# Altium PCB NGNIv1_32.PcbDoc
Units mm, origin at the board's own origin, x right, y up, seen from the top; angles counter-clockwise.
Board outline 13.53 x 22.03 mm, 4 copper layers (Component Side, Signal Layer 1, Signal Layer 2, Solder Side), stack 1.018 mm thick; 42 components, 78 nets, 338 pads, 161 vias.
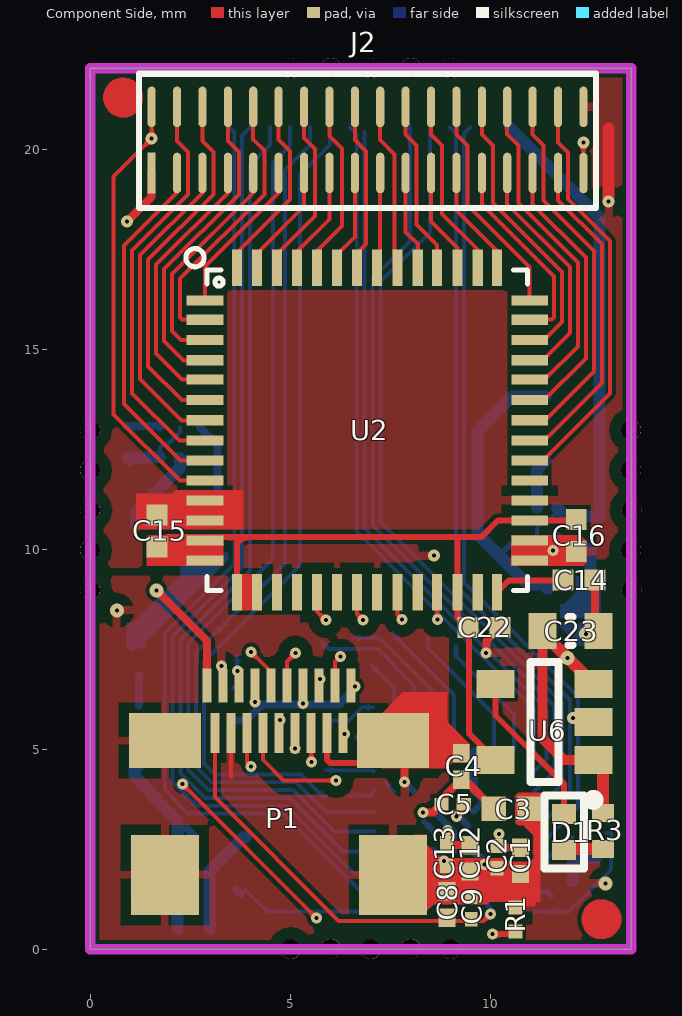
[diagram p0: Component Side view]
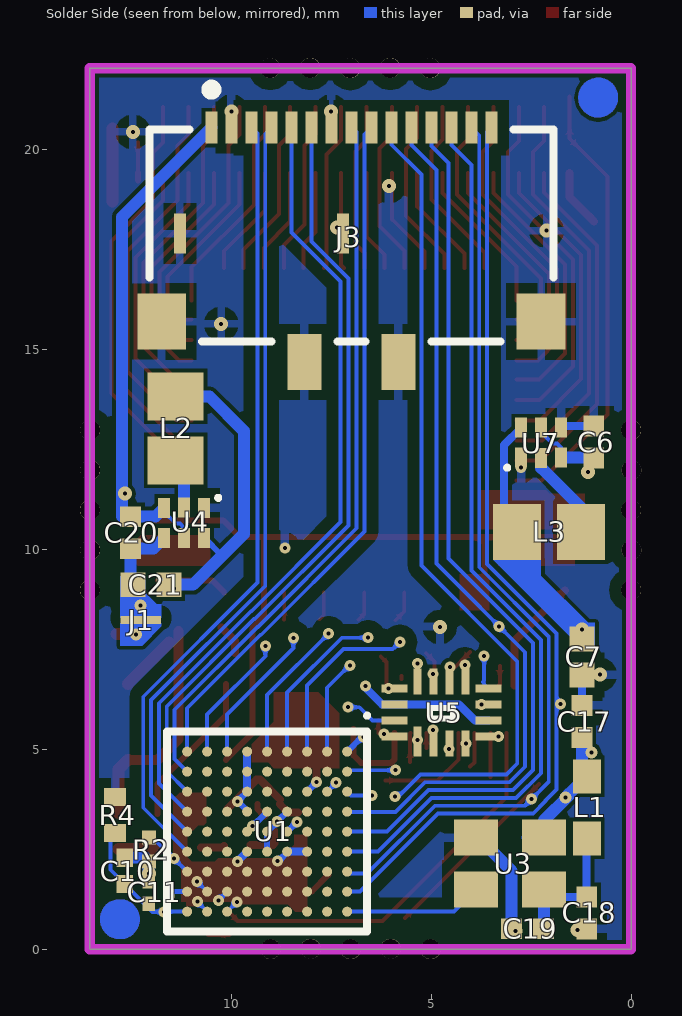
[diagram p1: Solder Side view, seen from below]
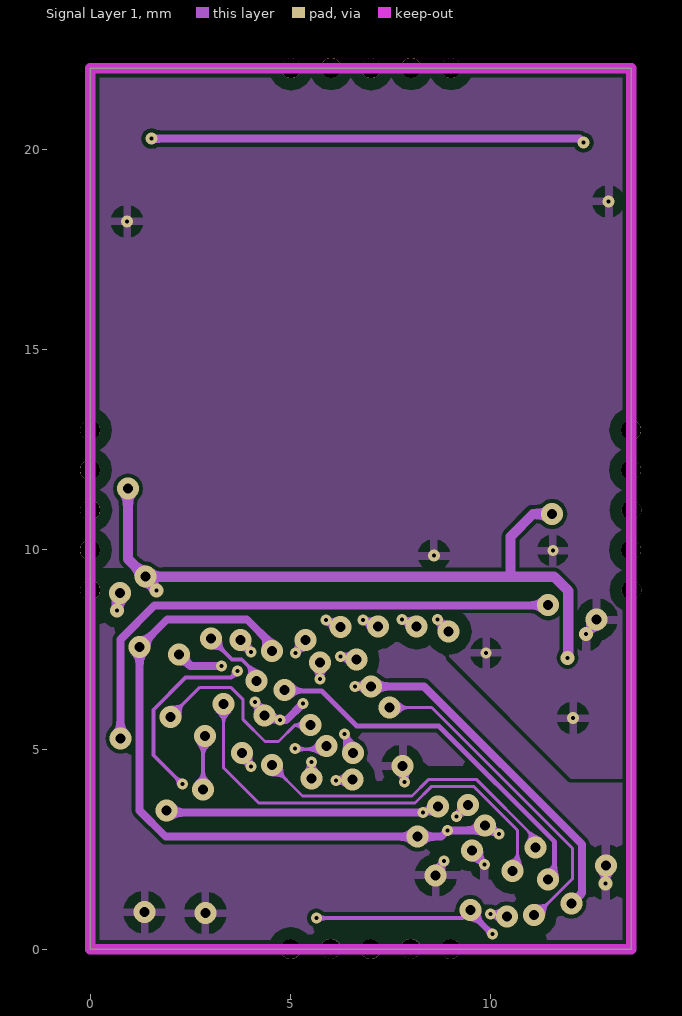
[diagram p2: Signal Layer 1]
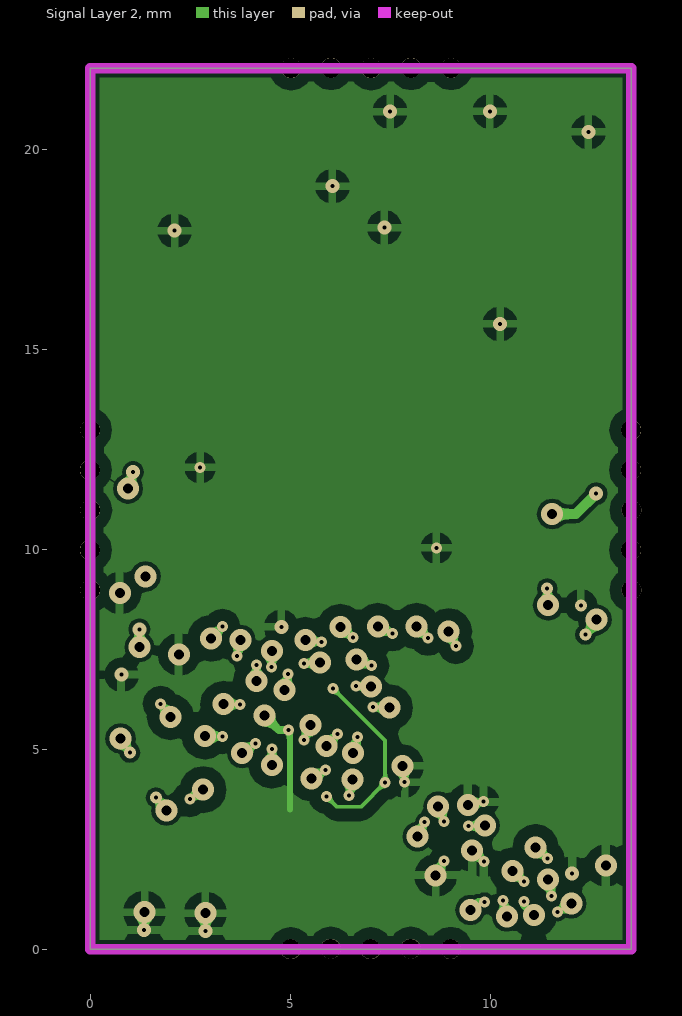
[diagram p3: Signal Layer 2]

## Layer stack, top to bottom
Top Solder: solder mask 0.015, Solder Resist, Dk 3.5
Component Side: signal copper 0.055
Dielectric 7: prepreg 0.068, 1080, Dk 3.5
Signal Layer 1: signal copper 0.035
Dielectric 3: core 0.71, 018+018+TG135, Dk 4.6
Signal Layer 2: signal copper 0.035
Dielectric 4: prepreg 0.06, 1080, Dk 3.5
Solder Side: signal copper 0.055
Bottom Solder: solder mask 0.015, Solder Resist, Dk 3.5

## Board outline
0,0 0,22.025 13.53,22.025 13.53,0

## Design rules (kind name [scope] priority, off if disabled: settings)
BoardOutlineClearance [All] p1: gap=0.23
Clearance Clearance_ploygon [InPolygon vs InNetClass('50Ohm')] p1: gap=0.3
Clearance Clearance_ploygon_mousebite [InPolygon vs (IsPad AND OnLayer('Multi-Layer'))] p2: gap=0.3
Clearance Clearance_fidu [InPolygon vs IsArc] p3: gap=0.1
Clearance Clearance_BGA [(InComponent('U1') AND IsPad)] p4: gap=0.09
Clearance Clearance-xPP-xTP-xTT [All] p5: gap=0.1
ComponentClearance [All] p1: gap=0.25 collisioncheckmode=3 verticalgap=0.25 showdistances=FALSE
DiffPairsRouting DiffPair_LVDS_100DiffPairsRouting [InDifferentialPairClass('LVDS_100')] p1: maxlimit=0.178 minlimit=0.15 mostfreqgap=0.152 toplayer_prefgap=0.152 toplayer_minwidth=0.15 toplayer_maxwidth=0.6 toplayer_prefwidth=0.25 midlayer1_maxgap=0.178 midlayer1_minwidth=0.15 midlayer1_maxwidth=0.6 midlayer1_prefwidth=0.25 midlayer2_maxgap=0.178 midlayer2_minwidth=0.15 midlayer2_maxwidth=0.6 midlayer2_prefwidth=0.25 bottomlayer_prefgap=0.152 bottomlayer_minwidth=0.15 bottomlayer_maxwidth=0.6 bottomlayer_prefwidth=0.25 maxuncoupledlength=12.7
FanoutControl Fanout_BGA [IsBGA] p1: bgadir=Out bgaviamode=Centered fanoutstyle=BGA fanoutdirection=Alternating viagrid=0.025 // Fanout_BGA (Default Rule)
Height [All] p1: minheight=0 maxheight=25 prefheight=12.5
HoleSize HoleSize-PTH [All] p1: absolutevalues=TRUE maxlimit=6.3 minlimit=0.1 maxpercent=80.000 minpercent=20.000
HoleToHoleClearance [All] p1: gap=0.15 allowstackedmicrovias=TRUE
MatchedLengths DiffPair_LVDS_100MatchedLengths [InDifferentialPairClass('LVDS_100')] p1: tolerance=12 checknetsindiffpair=TRUE checkdiffpairvsdiffpair=FALSE checkothers=FALSE
MaxMinImpedance DiffPair_LVDS_100 [InDifferentialPairClass('LVDS_100')] p1: minimum=100.0 maximum=100.0
MinimumAnnularRing "Minimum IAR  >0.45mm" [((ObjectKind = 'Pad') OR (ObjectKind = 'Via')) And (Layer = 'MultiLayer') And (HoleDiameter > AsMM(0.45))] p1 off: minimumring=0.25 // minimum inner annular ring for pads > 0.45mm finished hole size
MinimumAnnularRing "Minimum IAR <=0.45mm" [((ObjectKind = 'Pad') OR (ObjectKind = 'Via')) And (Layer = 'MultiLayer') And (HoleDiameter <= AsMM(0.45))] p2: minimumring=0.088 // minimum inner annular ring for pads <= 0.45mm finished hole size
MinimumSolderMaskSliver [All] p1: minsoldermaskwidth=0.04
PlaneClearance PlaneClearance-IPI [All] p1: clearance=0.4
PlaneConnect [All] p1: planeconnectstyle=Relief reliefexpansion=0.4 reliefentries=4 reliefconductorwidth=0.2 reliefairgap=0.2
PolygonConnect [All vs IsNamedPolygon('VCC_1.5_L04_P002')] p1: connectstyle=Relief reliefconductorwidth=0.254 reliefentries=4 polygonreliefangle="90 Angle" airgapwidth=0.254
PolygonConnect PolygonConnect-xTW [All] p2: connectstyle=Relief reliefconductorwidth=0.2 reliefentries=4 polygonreliefangle="90 Angle" airgapwidth=0.254
RoutingCorners [All] p1: cornerstyle=45-Degree minsetback=2.5 maxsetback=2.5
RoutingVias [All] p1: holewidth=0.1 width=0.275 viastyle="Through Hole" minholewidth=0.1 minwidth=0.275 maxholewidth=0.5 maxwidth=1 // finishet hole size <= 0.45mm
SilkToSilkClearance [All] p1: silktosilkclearance=0.2
SilkToSolderMaskClearance SilkscreenOverComponentPads [IsPad] p1: minsilkscreentomaskgap=0.2 clearancetoexposedcopper=TRUE
SolderMaskExpansion [All] p1: expansion=0.1
Width [(OnLayer('AGND_Prog') OR OnLayer('DGND_Prog'))] p1: maxlimit=0.5 minlimit=0.075 preferedwidth=0.2
Width DiffPair_LVDS_1 [InDifferentialPairClass('LVDS_100')] p2: maxlimit=1.251 minlimit=0.007 preferedwidth=0.98 toplayer_minwidth=1.251 toplayer_prefwidth=1.251 midlayer1_minwidth=0.98 midlayer1_maxwidth=0.98 midlayer2_minwidth=0.254 midlayer2_maxwidth=0.254 midlayer2_prefwidth=0.254 bottomlayer_maxwidth=0.007 bottomlayer_prefwidth=0.007 impedancedriven=TRUE minimp=50.000000 maximp=50.000000 favimp=50.000000
Width CLK [InNetClass('CLK')] p3: maxlimit=1.251 minlimit=-0.081 preferedwidth=0.98 toplayer_minwidth=0.251 toplayer_prefwidth=1.251 midlayer1_minwidth=0.194 midlayer1_maxwidth=0.98 midlayer2_minwidth=0.254 midlayer2_maxwidth=0.254 midlayer2_prefwidth=0.254 bottomlayer_maxwidth=0.007 bottomlayer_prefwidth=0.007 impedancedriven=TRUE minimp=50.000000 maximp=100.000000 favimp=50.000000
Width Width-xTW [All] p4: maxlimit=2 minlimit=0.075 preferedwidth=0.096
18 further rules are at their usual default settings.

## Classes and differential pairs
component class FPGA: C1 C2 C3 C4 C5 C8 C9 C10 C11 C12 C13 R1 R2 U1
component class AFE: C14 C15 C16 J2 U2
component class NGNIv1_32: C6 C7 C17 C18 C19 C20 C21 C22 C23 D1 J1 J3 L1 L2 L3 P1 R3 R4 R5 R6 R7 U3 U4 U5 U6 U7
net class Undefined: IN0 IN1 IN2 IN3 IN4 IN5 IN6 IN7 IN8 IN9 IN10 IN11 IN12 IN13 IN14 IN15 IN16 IN17 IN18 IN19 IN20 IN21 IN22 IN23 IN24 IN25 IN26 IN27 IN28 IN29 IN30 IN31 REF_ELEC
net class 50Ohm: 19M2_CLK CS_AS_M CS_AS_S CS_FX3 GPIO1 GPIO2 GPIO3 GPIO4 GPIO5 INTAN_CS INTAN_MISO INTAN_MOSI INTAN_SCK MISO_AS_S MISO_FX3 MOSI_AS_M MOSI_AS_S MOSI_FX3 SCK_AS_M SCK_AS_S SCK_FX3 TCK TDI TDO

## Components (designator, comment, footprint, x,y, rotation, side; value= is the part's Value field where it differs from the comment)
C1 "CAP 100nF 16V 0201(0603)" CAPC0201(0603)33_N 10.755,2.21 r270 top
C2 "CAP 10nF 16V 0201(0603)" CAPC0201(0603)33_L 10.17,2.301 r270 top
C3 "CAP 4.7uF 6.3V 0402(1005)" CAPC0402(1005)60_N 10.538,3.51 r0 top
C4 "CAP 100nF 16V 0201(0603)" CAPC0201(0603)33_N 9.276,4.571 r270 top
C5 "CAP 10nF 16V 0201(0603)" CAPC0201(0603)33_L 9.062,3.627 r180 top
C6 "CAP 2.2uF 10V 0402(1005)" CAPC0402(1005)60_L#1 0.935,12.679 r270 bottom
C7 "CAP 4.7uF 6.3V 0402(1005)" CAPC0402(1005)60_N 1.227,7.305 r270 bottom
C8 "CAP 100nF 16V 0201(0603)" CAPC0201(0603)33_N 8.92,1.12 r270 top
C9 "CAP 10nF 16V 0201(0603)" CAPC0201(0603)33_L 9.524,1.027 r270 top
C10 "CAP 100nF 16V 0201(0603)" CAPC0201(0603)33_N 12.66,1.96 r270 bottom
C11 "CAP 10nF 16V 0201(0603)" CAPC0201(0603)33_L 12.057,1.42 r270 bottom
C12 "CAP 100nF 16V 0201(0603)" CAPC0201(0603)33_N 9.494,2.274 r90 top
C13 "CAP 10nF 16V 0201(0603)" CAPC0201(0603)33_L 8.909,2.37 r270 top
C14 "CAP 10nF 25V 0402(1005)" CAPC0402(1005)60_L#1 12.22,9.23 r180 top
C15 "CAP 100nF 25V 0402(1005)" CAPC0402(1005)60_L#1 1.669,10.454 r270 top
C16 "CAP 100nF 25V 0402(1005)" CAPC0402(1005)60_L#2 12.15,10.347 r270 top
C17 "CAP 1uF 16V 0402(1005)" CAPC0402(1005)60_L#1 1.225,5.696 r270 bottom
C18 "CAP 1uF 16V 0402(1005)" CAPC0402(1005)60_L#1 1.109,0.909 r90 bottom
C19 "CAP 10nF 25V 0402(1005)" CAPC0402(1005)60_L#1 2.586,0.51 r180 bottom
C20 "CAP 2.2uF 10V 0402(1005)" CAPC0402(1005)60_L#1 12.51,10.414 r90 bottom
C21 "CAP 4.7uF 6.3V 0402(1005)" CAPC0402(1005)60_N 12.003,9.113 r0 bottom
C22 "CAP 1uF 16V 0402(1005)" CAPC0402(1005)60_L#1 9.841,8.046 r180 top
C23 "CAP 2.2uF 25V 0603(1608)" CAPC0603(1608)100_L 12.01,7.96 r180 top
D1 "LED2" "LED 0610" 11.84,2.931 r90 top
J1 "2 way net tie junction" 2WAY_MICRO 12.253,8.234 r270 bottom net-tie
J2 "Omnetics NSD-36-AA-GS" NSD-36-AA-GS 1.535,19.407 r90 top
J3 "502244-1530" MOLX-502244-1530 6.99,17.611 r180 bottom
L1 "742792691" SMD-0603 1.107,3.548 r90 bottom
L2 "Inductor" 2029 11.384,13.02 r90 bottom
L3 "Inductor" 2029 2.052,10.426 r0 bottom
P1 "Molex 46765-0301" "MOLEX 0467650301" 4.717,0.158 r0 top
R1 "1K 1% 0201(0603)" RESC0201(0603)_L 10.629,0.744 r90 top
R2 "1K 1% 0201(0603)" RESC0201(0603)_L 12.053,2.493 r270 bottom
R3 "1K5 1% 0402(1005)" RESC0402(1005)_L 12.813,2.961 r270 top
R4 "1K 1% 0402(1005)" RESC0402(1005)_L 12.895,3.362 r90 bottom
U1 "AGLN250V2-CSG81" CS81 9.097,2.941 r270 bottom
U2 "Intan Technologies RHD2132 chip" QFN56_LARGE 6.977,12.982 r0 top
U3 "EPSON SG-210SGB 19.2000ML3" SG-210S*B 2.176,2.793 r0 bottom
U4 "TPS622314DRYR" DRY0006A 11.17,10.66 r270 bottom
U5 "TS3A44159RSVR" UQFN-4 5.338,5.145 r180 bottom
U6 "NCP752 BSN33T1G" "TSOP5 NCP752" 11.356,5.683 r180 top
U7 "TPS62237DRYT" DRY0006A 2.246,12.664 r90 bottom

## Footprints (in the part's own frame and the unit in brackets; to place one, negate y for a bottom-side part, rotate by r counter-clockwise, add the part's x,y. Pads: shape width x height; smd on the part's side, far side on the other; paste and mask are expansions set on the pad)
2WAY_MICRO [mil] "2 way medium power net tie junction"
  rrect5% 4x40 smd paste-100: 1(-2,0) 2(2,0)
2029 [mm] "Chip Inductor, Body 2.0x1.2mm, IPC High Density"
  rect 1.2x1.4 smd: 1(-0.8,0) 2(0.8,0)
  body extent -1.1,-0.7 1.1,0.7, height 0.55
CAPC0201(0603)33_L [mm] "Chip Capacitor, Body 0.6x0.3mm, Height 0.33mm, IPC High Density"
  rect 0.36x0.32 smd: 1(-0.28,0) 2(0.28,0)
  body extent -0.32,-0.17 0.32,0.17, height 0.33
CAPC0201(0603)33_N [mm] "Chip Capacitor, Body 0.6x0.3mm, Height 0.33mm, IPC Medium Density"
  rect 0.46x0.42 smd: 1(-0.33,0) 2(0.33,0)
  body extent -0.31,-0.16 0.32,0.17, height 0.33
CAPC0402(1005)60_L#1 [mm] "Chip Capacitor, Body 1.0x0.5mm, Height 0.6mm, IPC High Density"
  rect 0.52x0.52 smd: 1(-0.4,0) 2(0.4,0)
  body extent -0.55,-0.3 0.55,0.3, height 0.6
CAPC0402(1005)60_L#2 [mm] "Chip Capacitor, Body 1.0x0.5mm, Height 0.6mm, IPC High Density"
  rect 0.52x0.52 smd: 1(0.4,0) 2(-0.4,0)
  body extent -0.55,-0.3 0.55,0.3, height 0.6
CAPC0402(1005)60_N [mm] "Chip Capacitor, Body 1.0x0.5mm, Height 0.6mm, IPC Medium Density"
  rect 0.62x0.62 smd: 1(-0.45,0) 2(0.45,0)
  body extent -0.55,-0.3 0.55,0.3, height 0.6
CAPC0603(1608)100_L [mm] "Chip Capacitor, Body 1.6x0.8mm, Height 1.0mm, IPC High Density"
  rect 0.7x0.9 smd: 1(-0.7,0) 2(0.7,0)
  silkscreen extent -0.05,-0.35 0.05,0.35, body extent -0.87,-0.47 0.88,0.48, height 1
CS81 [mm] "BGA, 81-Leads, Body 5x5mm, Pitch 0.5mm"
  round 0.25 smd: A1(-2,2) A2(-1.5,2) A3(-1,2) A4(-0.5,2) A5(0,2) A6(0.5,2) A7(1,2) A8(1.5,2) A9(2,2) B1(-2,1.5) B2(-1.5,1.5) B3(-1,1.5) B4(-0.5,1.5) B5(0,1.5) B6(0.5,1.5) B7(1,1.5) B8(1.5,1.5) B9(2,1.5) C1(-2,1) C2(-1.5,1) C3(-1,1) C4(-0.5,1) C5(0,1) C6(0.5,1) C7(1,1) C8(1.5,1) C9(2,1) D1(-2,0.5) D2(-1.5,0.5) D3(-1,0.5) D4(-0.5,0.5) D5(0,0.5) D6(0.5,0.5) D7(1,0.5) D8(1.5,0.5) D9(2,0.5) E1(-2,0) E2(-1.5,0) E3(-1,0) E4(-0.5,0) E5(0,0) E6(0.5,0) E7(1,0) E8(1.5,0) E9(2,0) F1(-2,-0.5) F2(-1.5,-0.5) F3(-1,-0.5) F4(-0.5,-0.5) F5(0,-0.5) F6(0.5,-0.5) F7(1,-0.5) F8(1.5,-0.5) F9(2,-0.5) G1(-2,-1) G2(-1.5,-1) G3(-1,-1) G4(-0.5,-1) G5(0,-1) G6(0.5,-1) G7(1,-1) G8(1.5,-1) G9(2,-1) H1(-2,-1.5) H2(-1.5,-1.5) H3(-1,-1.5) H4(-0.5,-1.5) H5(0,-1.5) H6(0.5,-1.5) H7(1,-1.5) H8(1.5,-1.5) H9(2,-1.5) J1(-2,-2) J2(-1.5,-2) J3(-1,-2) J4(-0.5,-2) J5(0,-2) J6(0.5,-2) J7(1,-2) J8(1.5,-2) J9(2,-2)
  silkscreen extent -2.95,-2.5 2.5,2.55, body extent -2.5,-2.5 2.5,2.5, height 0.8
DRY0006A [mm]
  rect 0.5x0.3 smd paste-0.102 mask+0.051: 1(-0.375,0.5) 2(-0.379,0) 3(-0.375,-0.5) 4(0.375,-0.5) 5(0.375,0) 6(0.375,0.5)
  silkscreen extent -0.67,0.8 -0.58,0.9, body extent -0.53,-0.75 0.53,0.75, height 0.6
"LED 0610" [mm]
  rect 0.5x0.6 smd: 1(-0.45,0) 2(0.45,0)
  silkscreen extent -0.91,-0.51 0.91,0.48, body extent -0.8,-0.41 0.81,0.38, height 0.2
"MOLEX 0467650301" [mm] "Micro HDMI without holes"
  rect 0.23x0.85 smd: 1(1.8,6.43) 3(1.4,6.43) 5(1,6.43) 7(0.6,6.43) 9(0.2,6.43) 11(-0.2,6.43) 13(-0.6,6.43) 15(-1,6.43) 17(-1.4,6.43) 19(-1.8,6.43)
  rect 0.23x1 smd: 2(1.6,5.25) 4(1.2,5.25) 6(0.8,5.25) 8(0.4,5.25) 10(0,5.25) 12(-0.4,5.25) 14(-0.8,5.25) 16(-1.2,5.25) 18(-1.6,5.25)
  rect 1.7x2 smd: MP1(-2.85,1.7) MP4(2.85,1.7)
  rect 1.8x1.38 smd: MP2(-2.85,5.06) MP3(2.85,5.06)
  body extent -3.25,-0.7 3.25,6.8, height 2.92
MOLX-502244-1530 [mm] "FFC Connector, 15-Leads, Right Angle, Pitch 0.5 mm, Mated Height 2.33 mm, SMT"
  rect 0.3x0.8 smd: 1(-3.5,2.93) 2(-3,2.93) 3(-2.5,2.93) 4(-2,2.93) 5(-1.5,2.93) 6(-1,2.93) 7(-0.5,2.93) 8(0,2.93) 9(0.5,2.93) 10(1,2.93) 11(1.5,2.93) 12(2,2.93) 13(2.5,2.93) 14(3,2.93) 15(3.5,2.93)
  rect 1.22x1.4 smd: MP1(-4.74,-1.92) MP2(4.74,-1.92)
  rect 0.85x1.4 smd: MP3(-1.175,-2.93) MP4(1.175,-2.93)
  silkscreen extent -5.05,-2.42 5.05,4, body extent -5.05,-3.28 5.05,3.18, height 2.34
NSD-36-AA-GS [mil]
  rect 40x8 smd: 1(0,0)
  oval 40x8 smd: 2(65,0) 3(0,-25) 4(65,-25) 5(0,-50) 6(65,-50) 7(0,-75) 8(65,-75) 9(0,-100) 10(65,-100) 11(0,-125) 12(65,-125) 13(0,-150) 14(65,-150) 15(0,-175) 16(65,-175) 17(0,-200) 18(65,-200) 19(0,-225) 20(65,-225) 21(0,-250) 22(65,-250) 23(0,-275) 24(65,-275) 25(0,-300) 26(65,-300) 27(0,-325) 28(65,-325) 29(0,-350) 30(65,-350) 31(0,-375) 32(65,-375) 33(0,-400) 34(65,-400) 35(0,-425) 36(65,-425)
  silkscreen extent -34,-438 98,13, body extent 2,-470 295,45, height 70
QFN56_LARGE [mil] "Intan_RHD2000 RHD2132 QFN56"
  rect 36x10 smd: 1(-161.73,127.53) 2(-161.73,108.53) 3(-161.73,88.53) 4(-161.73,68.53) 5(-161.73,49.53) 6(-161.73,29.53) 7(-161.73,9.53) 8(-161.73,-10.31) 9(-161.73,-30) 10(-161.73,-49.68) 11(-161.73,-69.37) 12(-161.73,-89.06) 13(-161.73,-108.74) 14(-161.73,-128.43) 29(157.72,-128.43) 30(157.72,-108.74) 31(157.72,-89.06) 32(157.72,-69.37) 33(157.72,-49.68) 34(157.72,-30) 35(157.72,-10.31) 36(157.72,9.53) 37(157.72,29.53) 38(157.72,49.53) 39(157.72,68.53) 40(157.72,88.53) 41(157.72,108.53) 42(157.72,127.53)
  rect 10x36 smd: 15(-130.24,-159.92) 16(-110.55,-159.92) 17(-90.87,-159.92) 18(-71.18,-159.92) 19(-51.5,-159.92) 20(-31.81,-159.92) 21(-12.13,-159.92) 22(7.72,-159.92) 23(27.72,-159.92) 24(47.72,-159.92) 25(66.72,-159.92) 26(86.72,-159.92) 27(106.72,-159.92) 28(125.72,-159.92) 43(125.72,159.53) 44(106.72,159.53) 45(86.72,159.53) 46(66.72,159.53) 47(47.72,159.53) 48(27.72,159.53) 49(7.72,159.53) 50(-12.13,159.53) 51(-31.81,159.53) 52(-51.5,159.53) 53(-71.18,159.53) 54(-90.87,159.53) 55(-110.55,159.53) 56(-130.24,159.53)
  silkscreen extent -181,-158 156,179, body extent -159,-158 156,157, height 33
RESC0201(0603)_L [mm] "Chip Resistor, Body 0.6x0.3mm, IPC High Density"
  rect 0.35x0.35 smd: 1(-0.3,0) 2(0.3,0)
  body extent -0.31,-0.16 0.31,0.16, height 0.3
RESC0402(1005)_L [mm] "Chip Resistor, Body 1.0x0.5mm, IPC High Density"
  rect 0.45x0.55 smd: 1(-0.45,0) 2(0.45,0)
  body extent -0.52,-0.27 0.53,0.28, height 0.4
SG-210S*B [mm] "CMOS Output CRYSTAL OSCILLATOR (SPXO)"
  rect 1.1x0.9 smd: 1(0,0) 2(1.7,0) 3(1.7,1.3) 4(0,1.3)
  body extent -0.4,-0.35 2.1,1.65, height 0.8
SMD-0603 [mm] "Chip Inductor, 2-Leads, Body 1.6x0.8mm"
  rect 0.85x0.7 smd: 1(-0.775,0) 2(0.775,0)
  body extent -0.8,-0.4 0.8,0.4, height 0.79
"TSOP5 NCP752" [mm] "NCP752 200 mA, Ultra-Low  Quiescent Current, IQ 12  A,  Ultra-Low Noise, Low  Dropout Regulator"
  rect 0.95x0.7 smd: 1(-1.225,0.95) 2(-1.225,0) 3(-1.225,-0.95) 4(1.225,-0.95) 5(1.225,0.95)
  silkscreen extent -1.35,-1.5 0.35,2.07, body extent -0.75,-1.5 0.75,1.5, height 1.1
UQFN-4 [mm]
  rect 0.2x0.75 smd: 1(0,0.05)
  rect 0.2x0.65 smd: 2(0.4,0) 3(0.8,0) 4(1.2,0) 9(1.2,1.55) 10(0.8,1.55) 11(0.4,1.55) 12(0,1.55)
  rect 0.65x0.2 smd: 5(1.775,0.175) 6(1.775,0.575) 7(1.775,0.975) 8(1.775,1.375) 13(-0.575,1.375) 14(-0.575,0.975) 15(-0.575,0.575) 16(-0.575,0.175)
  silkscreen extent 0.31,0.62 0.89,0.88, body extent -0.7,-0.21 1.89,1.71, height 0.5

## Part data
C1 C4 C8 C10 C12: library part CMP-1033-00663-1, "CAP 100nF 16V ?±10% 0201 (0603 Metric) Thickness 0.33mm SMD"
C2 C5 C9 C11 C13: library part CMP-1033-00642-1, "CAP 10nF 16V ?±10% 0201 (0603 Metric) Thickness 0.33mm SMD"
C3 C7 C21: library part CMP-1034-02137-1, "CAP 4.7uF 6.3V ?±20% 0402 (1005 Metric) Thickness 0.6mm SMD"
C6 C20: library part CMP-1034-02128-1, "CAP 2.2uF 10V ?±20% 0402 (1005 Metric) Thickness 0.6mm SMD"
C14 C19: library part CMP-1034-01879-1, "CAP 10nF 25V ±5% 0402 (1005 Metric) Thickness 0.6mm SMD"
C15 C16: library part CMP-1034-02072-1, "CAP 100nF 25V ±10% 0402 (1005 Metric) Thickness 0.6mm SMD"
C17: library part CMP-1034-02119-1, "CAP 1uF 16V ?±10% 0402 (1005 Metric) Thickness 0.6mm SMD"
C18: library part CMP-1034-02120-1, "CAP 1uF 16V ?±20% 0402 (1005 Metric) Thickness 0.6mm SMD"
C22: library part CMP-1034-02119-1, "CAP 1uF 16V ±10% 0402 (1005 Metric) Thickness 0.6mm SMD"
C23: library part CMP-1035-02767-1, "CAP 2.2uF 25V ±10% 0603 (1608 Metric) Thickness 1mm SMD"
D1: "Typical RED, GREEN, YELLOW, AMBER GaAs LED"
J1: library part 2way
J2: "NSD-36-AA-GS"
J3: library part MOLX-502244-1530
L1: library part CMP-0220-00115-1, "SMD EMI Suppression Ferrite Bead WE-CBF, Z = 1500 Ohm"
L2 L3: "LQM21PN2R2"
P1: "Micro HDMI"
R1 R2: library part CMP-1010-00416-1, "1K 0.05W 1% 0201 (0603 Metric)  SMD"
R3: library part CMP-1011-00528-1, "1K5 0.063W 1% 0402 (1005 Metric)  SMD"
R4: library part CMP-1011-00510-1, "1K 0.063W 1% 0402 (1005 Metric)  SMD"
U1: library part CMP-0101-00037-1, "IGLOO nano Low-Power Flash 1.2 to 1.5V FPGA with Flash*Freeze, 60 User IOs, 250K System Gates, 1Kbit Flash ROM, 81-Pin CSP, Commercial Grade, Pb-Free"
U2: library part RHD2132_QFN
U4 U7: "Voltage Regulators - Switching Regulators 3MHz,500mA Step- Down Converter"
U5: "0.45-? Quad SPDT Analog Switch 4-Channel 2:1 Multiplexer – Demultiplexer  With Two Controls"
U6: "3.3V LDO 200ma ultra low quiescent current, ultra low noise"

## Free pads (board coordinates)
  round 0.5 hole 0.5 unplated paste+0: 0(0,8.98) 0(5.01,0) 0(5.02,22.025) 0(13.53,8.98)
  round 0.5 hole 0.5 unplated: 1(-0.01,9.98) 1(6.01,0.01) 1(6.02,22.035) 1(13.52,9.98) 2(0,10.98) 2(7.01,0) 2(7.02,22.025) 2(13.53,10.98) 3(-0.01,11.98) 3(8.01,0.01) 3(8.02,22.035) 3(13.52,11.98) 4(-0.005,12.98) 4(9.01,0.005) 4(9.02,22.03) 4(13.525,12.98)
  rect 0.3x1 smd far side: MP1(11.28,17.89) MP2(7.2,17.89)

## Via types
v1: diameter 0.55, hole 0.25, Signal Layer 1 to Signal Layer 2, 51 vias
v2: diameter 0.275, hole 0.1, Signal Layer 2 to Solder Side, 31 vias
v3: diameter 0.275, hole 0.1, Component Side to Signal Layer 1, 21 vias
v4: diameter 0.35, hole 0.1, Signal Layer 2 to Solder Side, 15 vias
v5: diameter 0.275, hole 0.1, Signal Layer 2 to Solder Side, tented bottom, 14 vias
v6: diameter 0.275, hole 0.1, Component Side to Signal Layer 1, tented top, 11 vias
v7: diameter 0.3, hole 0.1, Component Side to Signal Layer 1, 6 vias
v8: diameter 0.3, hole 0.1, Signal Layer 2 to Solder Side, 4 vias
v9: diameter 0.35, hole 0.1, Component Side to Signal Layer 1, 4 vias
v10: diameter 0.55/0.55 (per signal layer), hole 0.25, Signal Layer 1 to Signal Layer 2, 2 vias
v11: diameter 0.35, hole 0.1, Component Side to Signal Layer 1, tented top, 1 vias
v12: diameter 0.3, hole 0.1, Signal Layer 2 to Solder Side, tented bottom, 1 vias

## Nets (pads, with @x,y where several pads share a name; then routed paths per layer and width w, separated by ;. In a path a pad name is that pad's centre, name@x,y a point inside that pad or via, vN(x,y) a via of type N, cw(c..) or ccw(c..) an arc to the next point about the centre after c; other vN are vias at no path point)
19M2_CLK: U1.A9 U3.3 | length 3.6
  Solder Side w0.096: U3.3 4.429,0.941 U1.A9
  Solder Side w0.2: U3.3@3.659,1.493 U3.3@3.768,1.385
AGND: C14.1 C15.1 C16.1 C22.1 C23.1 J1.2 J2.1 J2.36 U2.11 U2.12 U2.17 U2.29 U2.30 U2.32 U6.2 | length 6.9
  Component Side w0.2: v7(0.922,18.197) 1.535,18.81 J2.1 ; v3(9.897,7.407) 9.901,7.412 9.901,7.706 C22.1 ; C14.1 12.62,7.97 C23.1@12.71,7.88
  Component Side w0.3: v9(12.398,7.88) 12.71,7.88 C23.1@12.861,7.88 ; v7(12.958,18.697) 12.958,20.512
  Signal Layer 1 w0.2: v9(12.398,7.88) 12.66,8.141 v1(12.66,8.24)
  Signal Layer 2 w0.2: v8(12.378,7.866) 12.66,8.147 v1(12.66,8.24)
  other v3: 11.563,9.966
  other v7: 12.07,5.78 8.59,9.84
AVCC: C15.2 C16.2 C22.2 U2.13 U2.14 U2.15 U2.16 U2.26 U2.31 U6.5 | length 18
  Component Side w0.15: C15.2 1.918,10.303 3.801,10.303 ; U2.15 3.669,10.172 3.801,10.303 ; 9.18,10.22 U2.26 9.18,8.308 C22.2 9.467,8.021 9.467,5.398 U6.5 ; C16.2@12.053,10.724 12.049,10.72 U2.31 10.194,10.72 9.777,10.303 3.801,10.303
CS_AS_M: J3.13 U1.A6 | length 22.7
  Solder Side w0.096: J3.13 4.49,20.105 3.992,19.606 3.992,9.47 2.255,7.733 2.255,4.401 2.873,3.783 4.985,3.783 6.328,2.441 U1.A6
CS_AS_S: J3.4 U1.J5 | length 19.2
  Solder Side w0.096: J3.4 9.145,20.386 9.145,9.085 11.998,6.232 11.998,3.841 U1.J5
CS_FX3: P1.9 U1.C1 | length 6.1
  Component Side w0.096: P1.9 4.917,7.192 v3(5.126,7.401)
  Signal Layer 1 w0.2: v3(5.126,7.401) v1(5.38,7.725)
  Signal Layer 2 w0.2: v1(5.38,7.725) v2(5.78,7.68)
  Solder Side w0.096: v2(5.78,7.68) 5.957,7.503 7.19,7.503 8.097,6.596 U1.C1
DVCC_CORE: C3.1 C4.2 C5.2 C17.2 C21.1 L1.2 L2.2 U1.D4 U1.E5 U1.E6 U3.1 U4.6 | length 36.5
  Component Side w0.2: v3(8.321,3.417) 8.572,3.417 C5.2 ; C5.2@8.782,3.748 C4.2 9.358,4.241 C3.1
  Signal Layer 1 w0.2: v1(0.76,5.268) 0.755,5.273 0.755,7.747 1.606,8.598 11.446,8.598 v1(11.449,8.601) ; v1(1.909,3.466) 1.958,3.417 v3(8.321,3.417) v1(8.7,3.57)
  Signal Layer 2 w0.2: v1(0.76,5.268) v8(0.99,4.914) ; v8(1.643,3.792) v1(1.909,3.466) ; v1(8.7,3.57) v5(8.847,3.191) ; v8(11.424,9.018) v1(11.449,8.601)
  Solder Side w0.15: U1.D4 v5(8.847,3.191) U1.E5 U1.E6 ; 10.206,9.857 10.242,9.857 U4.6
  Solder Side w0.2: U3.1@2.407,3.024 U3.1@2.636,2.796
  Solder Side w0.3: C17.2 1.225,4.614 1.109,4.498 1.109,4.326 v8@1.558,3.876 ; v8(1.643,3.792) v8@1.558,3.876 ; U3.1 U3.1@2.176,3.042 ; U3.1@2.178,3.217 1.558,3.837 v8@1.558,3.876 ; L2.2 10.544,13.82 9.681,12.957 9.681,10.382 10.206,9.857 10.95,9.113 C21.1@11.424,9.113 ; v8(11.424,9.018) C21.1@11.461,9.018
DVCC_IO: C1.1 C2.1 C7.1 C12.2 C13.1 L3.2 U1.D5 U1.E4 U1.F5 U5.10 U7.6 | length 24.7
  Component Side w0.2: v3(8.931,2.97) 8.931,2.672 C13.1 8.956,2.603 C12.2@9.51,2.603 ; C2.1 10.211,2.54 C1.1
  Signal Layer 1 w0.2: v1@4.531,7.629 3.912,8.247 1.927,8.247 v1(1.23,7.55) 1.235,7.546 1.235,3.468 1.889,2.814 v10(8.18,2.814) 8.775,2.814 v3(8.931,2.97) v10@9.866,2.97 ; v10(9.866,3.091) v3(10.216,2.879)
  Signal Layer 2 w0.2: v4(1.227,7.996) v1(1.23,7.55) ; v2(4.528,7.053) v1(4.54,7.46) ; v10(8.18,2.814) v5(8.356,3.182) ; v5(9.46,3.078) v10(9.866,3.091)
  Solder Side w0.15: v5(8.356,3.182) U1.D5 ; U1.E4 v5(9.46,3.078)
  Solder Side w0.2: C7.1@1.02,7.562 1.032,7.55 1.227,7.745 v4(1.227,7.996) ; L3.2@2.743,10.588 3.179,11.024 3.179,12.606 U7.6
EXT_3V7: C6.2 C20.2 C23.2 J3.1 P1.19 R3.1 U4.3 U4.5 U6.1 U6.3 U7.3 U7.5 | length 44.6
  Component Side w0.2: v9(1.655,8.973) 2.917,7.711 P1.19
  Component Side w0.254: C23.2 11.31,5.259 11.835,4.733 U6.1
  Component Side w0.3: C23.2@11.547,7.668 v9(11.93,7.285) U6.3 ; U6.1 12.813,4.502 R3.1
  Signal Layer 1 w0.2: v9(11.93,7.285) 11.93,7.78 11.94,7.79
  Signal Layer 1 w0.254: v1(0.941,11.513) 0.941,9.759 v1(1.38,9.32) ; v1@1.385,9.313 10.51,9.313 ; v1@11.55,10.73 v1(11.55,10.88) 11.07,10.88 10.51,10.32 10.51,9.313 ; v9(11.93,7.285) 11.951,7.306 11.951,8.959 11.597,9.313 10.51,9.313
  Signal Layer 1 w0.3: v1(1.38,9.32) 1.385,9.313 v9(1.655,8.973)
  Signal Layer 2 w0.2: v1(0.941,11.513) v4(1.072,11.931)
  Signal Layer 2 w0.254: v1(11.55,10.88) 12.14,10.88 v4(12.65,11.39)
  Solder Side w0.1: U7.3 1.746,12.539 1.846,12.639 1.958,12.639 2.246,12.927 U7.5 ; U4.5 11.17,10.535 11.274,10.638 11.383,10.638 11.67,10.926 U4.3
  Solder Side w0.25: C20.2 C20.2@12.565,10.814
  Solder Side w0.3: C6.2 C6.2@0.997,12.217 ; C6.2@0.935,12.289 U7.3 ; J3.1 12.729,18.302 12.729,10.814 C20.2@12.584,10.814 ; U4.3 11.892,10.814 C20.2
GND: C1.2 C2.2 C3.2 C4.1 C5.1 C6.1 C7.2 C8.1 C9.1 C10.1 C11.1 C12.1 C13.2 C17.1 C18.1 C19.1 C20.1 C21.2 J1.1 J3.2 J3.7 J3.MP1 J3.MP2 J3.MP3 J3.MP4 P1.4 P1.7 P1.10 P1.13 P1.16 P1.17 P1.MP1 P1.MP2 P1.MP3 P1.MP4 pad.MP1 pad.MP2 R1.2 R2.2 R4.2 U1.C3 U1.C6 U1.D6 U1.F1 U1.F2 U1.F3 U1.F4 U1.F6 U3.2 U4.1 U4.4 U5.2 U7.1 U7.4 | length 36
  Component Side w0.096: 3.517,4.3 P1.16
  Component Side w0.1: v3(3.28,7.075) 3.28,6.625 P1.17
  Component Side w0.15: P1.4 5.917,4.74 5.996,4.661 6.752,4.661 6.939,4.848 P1.MP3@6.939,5.504 ; P1.MP4 7.98,1.444 C8.1@8.928,1.444 ; P1.MP3@7.859,4.926 P1.MP3 P1.MP3@8.134,5.785 ; v3(9.153,3.32) 9.342,3.509 C5.1 ; C9.1 9.066,1.307 C8.1@8.928,1.444 ; C1.2 10.158,1.88 9.917,2.121 v3(9.851,2.121) 9.673,1.943 9.51,1.943 9.363,2.09 C13.2 8.909,1.464 C8.1@8.928,1.444
  Component Side w0.2: v5(7.859,4.179) P1.MP3@7.859,4.926
  Component Side w0.3: P1.MP3@7.859,4.926 7.884,4.901 C4.1 ; C1.2 10.889,1.88 11.29,2.282 11.29,3.209 C3.2
  Signal Layer 1 w0.2: v1(2.214,7.373) 2.512,7.075 v3(3.28,7.075) ; v3(4.12,6.18) v1(4.351,5.841) v3(4.745,5.725) 4.899,5.725 v3(5.32,6.147) ; v1(7.807,4.586) v5(7.859,4.179) ; v1(8.637,1.848) v3(8.839,2.201) ; v3(9.153,3.32) v1(9.443,3.608) ; v1(9.547,2.474) v3(9.851,2.121) ; v11(12.883,1.649) v1(12.89,2.094)
  Signal Layer 1 w0.3: v9(0.669,8.471) v1(0.743,8.906)
  Signal Layer 2 w0.15: v2(4.951,5.475) 4.99,5.436 4.99,3.497
  Signal Layer 2 w0.2: v4(1.341,0.483) v1(1.357,0.925) ; v1(2.877,0.902) v4(2.886,0.457) ; v1(4.351,5.841) 4.717,5.475 v2(4.951,5.475) ; v1(7.807,4.586) v5(7.859,4.179) ; v1(8.637,1.848) v3(8.839,2.201) ; v1(9.443,3.608) v5(9.837,3.691) ; v1(9.547,2.474) v5(9.844,2.194)
  Solder Side w0.15: v5(7.859,4.179) U1.C3 ; U1.D6 8.597,2.417 8.814,2.201 v3(8.839,2.201) ; U1.F4@9.563,3.441 U1.F4 9.597,3.462 9.837,3.701 U1.F3
  Solder Side w0.2: C6.1@0.893,13.083 1.702,13.083 U7.4 ; C6.1@0.932,13.079 C6.1 ; C17.1 1.225,6.853 C7.2 ; U1.C6 U1.D6 ; U1.F6 v5(9.844,2.194) ; U1.F3 U1.F2 U1.F1
  Solder Side w0.3: C19.1 2.986,1.957 3.823,2.793 U3.2 ; U4.4 11.942,10.014 C20.1 12.51,9.17 C21.2 ; C11.1 12.057,2.189 R2.2 12.151,2.29 C10.1
  other v2: 8.653,10.036 2.75,12.047
  other v4: 12.046,1.895 0.779,6.862 4.777,8.056 10.245,15.632 2.111,17.963 7.352,18.041 6.055,19.076 12.455,20.433 7.496,20.94 9.991,20.945
  other v5: 8.839,2.201
  other v6: 7.859,4.179
  other v12: 12.265,8.597
GPIO1: J3.10 U1.B3 U5.13 | length 25.7
  Signal Layer 2 w0.096: v2(5.904,3.822) 6.166,3.56 6.768,3.56 v5(7.372,4.164) 7.372,5.216 v2(6.068,6.52)
  Solder Side w0.075: U1.B3@7.56,3.941 7.596,3.941 U1.B3
  Solder Side w0.096: v2(5.904,3.822) 5.814,3.822 5.264,4.371 3.116,4.371 2.843,4.644 2.843,7.194 5.242,9.594 5.242,19.365 5.99,20.113 J3.10 ; v5(7.372,4.164) U1.B3@7.596,3.941
GPIO2: J3.15 U1.A8 U5.1 | length 29.3
  Signal Layer 1 w0.075: v1(2.002,5.812) 2.739,6.549 3.51,6.549 3.824,6.234 3.824,5.738 4.369,5.193 4.705,5.193 5.111,5.6 v1(5.51,5.6)
  Signal Layer 2 w0.2: v2(1.762,6.136) v1(2.002,5.812) ; v2(5.339,5.228) v1(5.51,5.6)
  Solder Side w0.096: J3.15 3.6,20.431 3.6,9.632 1.863,7.896 1.863,3.993 2.134,3.722 2.134,3.702 2.445,3.391 4.822,3.391 6.773,1.441 U1.A8
GPIO3: J3.14 U1.A7 U5.5 | length 25.4
  Signal Layer 1 w0.096: v1(2.82,3.99) 2.82,5.21 2.785,5.245 v1(2.869,5.33)
  Signal Layer 2 w0.2: v2(2.49,3.75) v1(2.82,3.99) ; v1(2.869,5.33) v2(3.308,5.318)
  Solder Side w0.096: U5.5@3.535,5.292 U5.5 ; J3.14 3.796,20.346 3.796,9.551 2.059,7.815 2.059,4.181 v2(2.49,3.75) 2.653,3.587 4.904,3.587 6.6,1.891 7.048,1.891 U1.A7
GPIO4: J3.11 U1.A4 U5.9 | length 24.6
  Signal Layer 1 w0.096: v1(3.018,7.772) 3.543,7.247 3.787,7.247 4.155,6.879 v1(4.155,6.7)
  Signal Layer 2 w0.2: v1(3.018,7.772) 3.304,8.059 v2(3.304,8.067) ; v2(4.153,7.11) v1(4.155,6.7)
  Solder Side w0.096: J3.11 5.49,20.109 4.867,19.485 4.867,9.645 2.647,7.425 2.647,4.563 3.035,4.175 5.147,4.175 5.892,3.431 7.087,3.431 U1.A4
GPIO5: J3.9 U1.J1 | length 17.5
  Solder Side w0.096: J3.9 6.664,20.368 6.664,10.443 9.245,7.861 9.26,7.861 11.097,6.024 U1.J1
HOT_PLUG: P1.2 U1.A1 | length 1.8
  Component Side w0.1: P1.2 P1.2@6.317,5.736
  Signal Layer 1 w0.2: v3(6.359,5.381) v1(6.563,4.911)
  Signal Layer 2 w0.2: v1(6.563,4.911) v2(6.688,5.3)
  Solder Side w0.15: v2(6.688,5.3) 6.738,5.3 U1.A1
IN0: J2.3 U2.9 | length 8.9
  Component Side w0.1: J2.3 2.17,18.913 0.85,17.592 0.85,13.628 2.258,12.22 U2.9
IN1: J2.4 U2.8 | length 10.2
  Component Side w0.1: J2.4 2.17,20.205 2.447,19.928 2.447,18.871 1.05,17.474 1.05,13.899 2.229,12.72 U2.8
IN2: J2.5 U2.7 | length 7.8
  Component Side w0.1: J2.5 2.805,18.911 1.25,17.356 1.25,14.254 2.279,13.224 U2.7
IN3: J2.6 U2.6 | length 9
  Component Side w0.1: J2.6 2.805,20.205 3.082,19.928 3.082,18.87 1.45,17.238 1.45,14.571 2.288,13.732 U2.6
IN4: J2.7 U2.5 | length 6.7
  Component Side w0.1: U2.5 2.297,14.24 1.65,14.888 1.65,17.12 3.44,18.91 J2.7
IN5: J2.8 U2.4 | length 8
  Component Side w0.1: U2.4 2.332,14.723 1.85,15.205 1.85,17.001 3.717,18.868 3.717,19.928 3.44,20.205 J2.8
IN6: J2.9 U2.3 | length 5.7
  Component Side w0.1: U2.3 2.274,15.231 2.05,15.455 2.05,16.883 4.075,18.909 J2.9
IN7: J2.10 U2.2 | length 6.9
  Component Side w0.1: U2.2 2.3,15.739 2.25,15.789 2.25,16.765 4.352,18.867 4.352,19.971 4.075,20.247 J2.10
IN8: J2.11 U2.1 | length 3.9
  Component Side w0.1: U2.1 2.869,17.066 4.71,18.907 J2.11
IN9: J2.12 U2.56 | length 4.7
  Component Side w0.1: U2.56 3.669,17.417 4.99,18.738 4.99,19.962 4.71,20.242 J2.12
IN10: J2.13 U2.55 | length 2.9
  Component Side w0.1: U2.55 4.169,17.398 5.345,18.574 J2.13
IN11: J2.14 U2.54 | length 4.5
  Component Side w0.1: U2.54 4.669,17.38 5.622,18.332 5.622,20.004 5.345,20.28 J2.14
IN12: J2.15 U2.53 | length 2.7
  Component Side w0.1: U2.53 5.169,17.439 5.98,18.25 J2.15
IN13: J2.16 U2.52 | length 4.4
  Component Side w0.1: U2.52 5.669,17.459 6.291,18.08 6.291,20.023 5.98,20.334 J2.16
IN14: J2.17 U2.51 | length 2.6
  Component Side w0.1: U2.51 6.169,17.366 6.615,17.812 J2.17
IN15: J2.18 U2.50 | length 4.2
  Component Side w0.1: J2.18 6.615,20.226 6.892,19.949 6.892,17.628 6.669,17.406 U2.50
IN16: J2.19 U2.49 | length 2.4
  Component Side w0.1: U2.49 7.25,17.111 J2.19
IN17: J2.20 U2.48 | length 4.2
  Component Side w0.1: J2.20 7.25,20.226 7.609,19.867 7.609,17.107 U2.48
IN18: J2.21 U2.47 | length 2.5
  Component Side w0.1: J2.21 7.885,17.934 8.189,17.63 U2.47
IN19: J2.22 U2.46 | length 4.3
  Component Side w0.1: J2.22 7.885,20.367 8.162,20.09 8.162,18.122 8.672,17.612 U2.46
IN20: J2.23 U2.45 | length 2.6
  Component Side w0.1: J2.23 8.52,18.189 9.18,17.53 U2.45
IN21: J2.24 U2.44 | length 4.5
  Component Side w0.1: J2.24 8.52,20.367 8.797,20.09 8.797,18.385 9.688,17.494 U2.44
IN22: J2.25 U2.43 | length 2.8
  Component Side w0.1: J2.25 9.155,18.468 10.17,17.452 U2.43
IN23: J2.26 U2.42 | length 5.6
  Component Side w0.1: J2.26 9.155,20.367 9.432,20.09 9.432,18.609 10.983,17.058 U2.42
IN24: J2.27 U2.41 | length 5
  Component Side w0.1: J2.27 9.79,18.618 11.59,16.818 11.59,15.793 11.536,15.739 U2.41
IN25: J2.28 U2.40 | length 7.2
  Component Side w0.1: J2.28 9.79,20.367 10.067,20.09 10.067,18.659 11.79,16.936 11.79,15.675 11.346,15.231 U2.40
IN26: J2.29 U2.39 | length 5.9
  Component Side w0.1: J2.29 10.425,18.619 11.99,17.054 11.99,15.406 11.307,14.723 U2.39
IN27: J2.30 U2.38 | length 8.3
  Component Side w0.1: J2.30 10.425,20.367 10.702,20.09 10.702,18.661 12.19,17.172 12.19,15.072 11.359,14.24 U2.38
IN28: J2.31 U2.37 | length 7
  Component Side w0.1: U2.37 11.35,13.732 12.39,14.773 12.39,17.29 11.06,18.621 J2.31
IN29: J2.32 U2.36 | length 9.4
  Component Side w0.1: U2.36 11.368,13.224 12.59,14.447 12.59,17.461 11.337,18.714 11.337,20.09 11.06,20.367 J2.32
IN30: J2.33 U2.35 | length 8.1
  Component Side w0.1: U2.35 11.354,12.72 12.79,14.157 12.79,17.626 11.695,18.721 J2.33
IN31: J2.34 U2.34 | length 10.4
  Component Side w0.1: U2.34 11.313,12.22 12.99,13.897 12.99,17.709 11.947,18.752 11.947,19.918 11.695,20.169 J2.34
INTAN_CS: U1.D1 U2.19 | length 5.7
  Component Side w0.096: U2.19 5.669,8.445 v6(5.888,8.226)
  Signal Layer 1 w0.2: v6(5.888,8.226) v1(6.255,8.05)
  Signal Layer 2 w0.2: v1(6.255,8.05) v2(6.571,7.789)
  Solder Side w0.096: v2(6.571,7.789) 7.223,7.789 8.597,6.414 U1.D1
INTAN_MISO: U1.H1 U2.25 | length 4.7
  Component Side w0.096: U2.25 8.672,8.248 v6(8.68,8.24)
  Signal Layer 1 w0.2: v6(8.68,8.24) v1(8.96,7.94)
  Signal Layer 2 w0.2: v1(8.96,7.94) v2(9.142,7.575)
  Solder Side w0.096: v2(9.142,7.575) 9.142,7.323 10.597,5.868 U1.H1
INTAN_MOSI: U1.G1 U2.23 | length 5.1
  Component Side w0.096: U2.23 7.681,8.358 v6(7.791,8.248)
  Signal Layer 1 w0.2: v6(7.791,8.248) v1(8.161,8.075)
  Signal Layer 2 w0.2: v1(8.161,8.075) v2(8.441,7.777)
  Solder Side w0.096: v2(8.441,7.777) 8.441,7.527 10.097,5.87 U1.G1
INTAN_SCK: U1.E1 U2.21 | length 5.2
  Component Side w0.096: U2.21 6.669,8.383 v6(6.815,8.237)
  Signal Layer 1 w0.2: v6(6.815,8.237) v1(7.188,8.07)
  Signal Layer 2 w0.2: v1(7.188,8.07) v2(7.558,7.892)
  Solder Side w0.096: v2(7.558,7.892) 9.097,6.352 U1.E1
MISO_AS_S: J3.5 U1.J4 | length 19.8
  Solder Side w0.096: J3.5 8.49,17.919 7.26,16.689 7.26,10.677 9.489,8.449 9.504,8.449 11.802,6.151 11.802,4.145 U1.J4
MISO_FX3: P1.6 U1.A2 | length 2.8
  Component Side w0.096: P1.6 5.527,5.398 v3(5.527,4.683)
  Signal Layer 1 w0.2: v3(5.527,4.683) v1(5.528,4.274)
  Signal Layer 2 w0.2: v1(5.528,4.274) v2(5.884,4.476)
  Solder Side w0.096: v2(5.884,4.476) 7.062,4.476 U1.A2
MOSI_AS_M: J3.8 U1.J2 | length 18
  Solder Side w0.096: J3.8@6.86,20.435 6.86,10.524 9.327,8.057 9.341,8.057 11.41,5.988 11.41,4.753 U1.J2
MOSI_AS_S: J3.6 U1.J3 | length 19.1
  Solder Side w0.096: J3.6 7.99,17.697 7.064,16.771 7.064,10.596 9.408,8.253 9.423,8.253 11.606,6.069 11.606,4.449 U1.J3
MOSI_FX3: P1.3 U1.B1 | length 4
  Component Side w0.096: P1.3 6.117,7.182 v3(6.257,7.322)
  Signal Layer 1 w0.2: v3(6.257,7.322) v1(6.653,7.238)
  Signal Layer 2 w0.2: v1(6.653,7.238) v2(7.03,7.09)
  Solder Side w0.096: v2(7.03,7.09) 7.046,7.09 7.597,6.539 U1.B1
NetC14_2: C14.2 U2.28 | length 1.8
  Component Side w0.15: U2.28 10.47,9.22 C14.2@11.82,9.22
NetC18_2: C18.2 C19.2 L1.1 U3.4 | length 3.6
  Solder Side w0.2: L1.1 1.109,2.772 C18.2 1.992,1.309 U3.4 ; C19.2@2.179,0.51 C19.2
  Solder Side w0.3: U3.4 2.179,1.49 C19.2@2.179,0.51
NetD1_1: D1.1 R3.2 | length 1
  Component Side w0.3: D1.1 11.87,2.511 R3.2
NetD1_2: D1.2 U6.4 | length 4
  Component Side w0.15: U6.4 10.131,5.844 11.84,4.135 D1.2
NetL2_1: L2.1 U4.2 | length 1.3
  Solder Side w0.3: U4.2 11.17,12.007 L2.1
NetL3_1: L3.1 U7.2 | length 2.2
  Solder Side w0.3: L3.1@1.143,10.588 1.143,10.933 2.246,12.036 U7.2
NetP1_5: P1.5 U5.12 | length 0.9
  Component Side w0.096: v3(5.74,6.76) P1.5@5.74,6.835
  Signal Layer 1 w0.2: v3(5.74,6.76) v1(5.744,7.164)
  Signal Layer 2 w0.2: v2(5.34,7.144) v1(5.744,7.164)
NetP1_8: P1.8 U5.16 | length 1.6
  Component Side w0.096: v3(5.117,5.023) P1.8
  Signal Layer 1 w0.096: v3@5.13,5 5.83,5 v1(5.905,5.075)
  Signal Layer 2 w0.2: v1(5.905,5.075) v2(6.177,5.379)
  Solder Side w0.096: U5.16@5.905,5.312 U5.16
NetP1_11: P1.11 U5.8 | length 2.8
  Component Side w0.096: v3(4.02,7.43) 4.024,7.43 4.517,6.937 P1.11
  Signal Layer 1 w0.2: v1(3.752,7.736) v3(4.02,7.43)
  Signal Layer 2 w0.2: v2(3.673,7.333) v1(3.752,7.736)
  Solder Side w0.096: U5.8 3.681,6.638 3.669,6.65 3.701,6.683 3.673,6.711 v2(3.673,7.333)
NetP1_14: P1.14 U5.4 | length 1.7
  Component Side w0.096: P1.14 3.917,4.671 v6(4.023,4.565)
  Signal Layer 1 w0.2: v1(3.799,4.909) v6(4.023,4.565)
  Signal Layer 2 w0.2: v1(3.799,4.909) v2(4.13,5.149)
REF_ELEC: J2.2 J2.35 U2.10 | length 23.1
  Component Side w0.1: J2.2@1.535,21.318 J2.2 v7(1.535,20.264) 0.587,19.316 0.587,13.372 2.239,11.72 U2.10 ; J2.35 v7(12.33,20.168)
  Component Side w0.15: J2.35@12.331,19.224 J2.35
  Signal Layer 1 w0.2: v7(1.535,20.264) 12.234,20.264 v7(12.33,20.168)
SCK_AS_M: J3.12 U1.A5 | length 22.4
  Solder Side w0.096: J3.12 4.99,20.081 4.565,19.655 4.565,9.766 2.451,7.652 2.451,4.482 2.954,3.979 5.066,3.979 6.105,2.941 U1.A5
SCK_AS_S: J3.3 U1.J6 | length 19.8
  Solder Side w0.096: J3.3 9.341,20.391 9.341,9.166 12.194,6.313 12.194,3.537 U1.J6
SCK_FX3: P1.12 U1.A3 | length 4.2
  Component Side w0.096: P1.12 4.317,4.737 4.835,4.219 v6(6.146,4.219)
  Signal Layer 1 w0.2: v6(6.146,4.219) v1(6.555,4.245)
  Signal Layer 2 w0.2: v2(6.473,3.846) v1(6.555,4.245)
  Solder Side w0.096: v2(6.473,3.846) 7.002,3.846 U1.A3
TCK: R2.1 U1.J7 U5.3 | length 10
  Signal Layer 1 w0.075: v1(4.54,4.6) 5.308,3.832 8.046,3.832 8.451,4.238 9.666,4.238 11.132,2.771 v1(11.132,2.545)
  Signal Layer 2 w0.2: v1(4.54,4.6) v2(4.546,5.004) ; v1(11.132,2.545) v5(11.43,2.262)
  Solder Side w0.096: U1.J7 11.419,2.262 v5(11.43,2.262) 11.961,2.793 R2.1
TDI: U1.H8 U5.7 | length 12.2
  Signal Layer 1 w0.075: v1(3.335,6.126) 3.335,4.533 4.211,3.657 8.118,3.657 8.524,4.063 9.593,4.063 10.683,2.973 10.683,2.093 v1(10.552,1.962)
  Signal Layer 2 w0.2: v1(3.335,6.126) v2(3.744,6.117) ; v1(10.552,1.962) v5(10.849,1.691)
  Solder Side w0.075: U1.H8 U1.H8 v5(10.849,1.691)
TDO: U1.H9 U5.15 | length 10.6
  Signal Layer 1 w0.075: v1(7.478,6.042) 8.538,6.042 12.056,2.524 12.056,1.762 11.147,0.854 v1(11.09,0.854)
  Signal Layer 2 w0.2: v2(7.07,6.05) v1(7.478,6.042) ; v5(10.843,1.187) 10.843,1.102 v1(11.09,0.854)
  Solder Side w0.075: U1.H9@10.606,0.941 U1.H9 10.597,0.942 v5(10.843,1.187)
  Solder Side w0.096: U5.15 6.463,5.72 6.793,6.05 v2(7.07,6.05)
TMS: U1.J8 U5.11 | length 10.6
  Signal Layer 1 w0.125: v1(4.855,6.481) 4.876,6.46 5.783,6.46 6.66,5.583 8.714,5.583 11.611,2.686 11.611,1.901 v1(11.45,1.74)
  Signal Layer 2 w0.2: v1(4.855,6.481) v2(4.949,6.88) ; v1(11.45,1.74) v2(11.534,1.337)
  Solder Side w0.125: U1.J8 11.431,1.441 v2(11.534,1.337)
TRST: P1.15 R1.1 U1.G9 | length 15.7
  Component Side w0.096: P1.15@3.68,6.854 v3(3.68,6.95) P1.15@3.683,6.95
  Component Side w0.1: v6(2.305,4.125) v6(5.65,0.78) ; v6@10.017,0.41 v6(10.052,0.375)
  Component Side w0.15: v6(10.052,0.375) 10.56,0.375 R1.1
  Signal Layer 1 w0.096: v6(2.305,4.125) 1.579,4.851 1.579,5.987 2.382,6.79 3.52,6.79 v3(3.68,6.95)
  Signal Layer 1 w0.1: v6(5.65,0.78) 9.3,0.78 v1(9.501,0.98)
  Signal Layer 1 w0.15: v1(9.501,0.98) 9.501,0.926 v6(10.052,0.375)
  Signal Layer 2 w0.2: v1(9.501,0.98) 9.705,1.185 v5(9.855,1.185)
  Solder Side w0.075: v5(9.855,1.185) U1.G9
  Solder Side w0.096: v5(9.855,1.185) v5(9.855,1.185) ; U1.G9 U1.G9@10.097,0.945
VJTAG: C8.2 C9.2 P1.18 U1.G8 | length 11
  Component Side w0.1: P1.18 3.117,3.803 6.212,0.708 9.834,0.708 v6(10.007,0.881)
  Signal Layer 1 w0.2: v6(10.007,0.881) v1(10.414,0.822)
  Signal Layer 2 w0.2: v5(10.318,1.218) v1(10.414,0.822)
  Solder Side w0.096: U1.G8 v5(10.318,1.218) v5(10.318,1.218)
VPUMP: C10.2 C11.2 P1.1 R4.1 U1.J9 U5.6 U5.14 | length 16.5
  Signal Layer 1 w0.2: v3(6.615,6.574) v1(7.02,6.569) 8.347,6.569 12.293,2.622 12.293,1.403 v1(12.03,1.14)
  Signal Layer 2 w0.2: v2(6.645,6.575) v1(7.02,6.569) ; v5(11.678,0.935) v1(12.03,1.14)
  Solder Side w0.096: U1.J9 v5@11.639,0.941 ; v5@11.656,0.957 v5@11.678,0.979 ; v5(11.678,0.935) 11.964,0.935 C10.2 13.018,1.988 13.018,2.912 R4.1
  Solder Side w0.2: U5.6 3.9,5.72 4.3,6.12 U5.14 6.221,6.12 6.645,6.544 v2(6.645,6.575)
pads on no net: U1.B2 U1.B4 U1.B5 U1.B6 U1.B7 U1.B8 U1.B9 U1.C2 U1.C4 U1.C5 U1.C7 U1.C8 U1.C9 U1.D2 U1.D3 U1.D7 U1.D8 U1.D9 U1.E2 U1.E3 U1.E7 U1.E8 U1.E9 U1.F7 U1.F8 U1.F9 U1.G2 U1.G3 U1.G4 U1.G5 U1.G6 U1.G7 U1.H2 U1.H3 U1.H4 U1.H5 U1.H6 U1.H7 U2.18 U2.20 U2.22 U2.24 U2.27 U2.33
copper on no net: | length 6.3
  Component Side w0.5: 1.073,21.291 ccw(c0.823,21.291) 1.073,21.291 ; 13.03,0.75 ccw(c12.78,0.75) 13.03,0.75
  Solder Side w0.5: 1.073,21.291 ccw(c0.823,21.291) 1.073,21.291 ; 13.03,0.75 ccw(c12.78,0.75) 13.03,0.75

## Polygon pours and split planes (outlines as drawn)
no net on Top Paste "AGND_L01_P-001" (solid, pour order 6): 4.418,15.475 9.418,15.475 9.418,10.5 4.418,10.5 4.418,15.475
no net on Top Solder "AGND_L01_P-001" (solid): 4.418,15.475 9.418,15.475 9.418,10.5 4.418,10.5 4.418,15.475
GND on Signal Layer 1 "GND_L02_P025" (solid, remove dead copper, pour order 25): 0,0.006 0,9.286 1.345,9.286 13.53,9.286 13.53,0.006
GND on Signal Layer 1 "GND_L02_P024" (solid, remove dead copper, pour order 24): 0,0.006 0,9.286 1.345,9.286 13.53,9.286 13.53,0.006
GND on Signal Layer 1 "GND_L02_P022" (solid, remove dead copper, pour order 22): 0,0.006 0,9.286 1.345,9.286 13.53,9.286 13.53,0.006
AGND on Signal Layer 1 "AGND_L02_P018" (solid, remove dead copper, pour order 18): 0,22.025 13.53,22.025 13.53,4.267 12.018,4.267 8.978,7.308 8.978,9.537 0.256,9.537 0,9.537
AGND on Component Side "AGND_L01_P016" (solid, remove dead copper, pour order 16): 0,22.025 13.53,22.025 13.53,3.913 9.954,3.913 8.67,5.197 8.67,9.537 0.256,9.537 0,9.537
GND on Component Side "GND_L01_P020" (solid, remove dead copper, pour order 20): 0,-0.003 0,9.332 8.96,9.332 8.96,4.116 10.942,4.116 13.53,4.116 13.53,0.005
GND on Solder Side "GND_L04_P017" (solid, remove dead copper, pour order 17): 0,0 0,22.025 13.53,22.025 13.53,0
GND on Signal Layer 2 "GND_L03_P027" (solid, remove dead copper, pour order 27): 0,0 0,22.025 13.53,22.025 13.53,0

## Keep-outs
Keep-Out Layer:
  the board outline again, w0.26

## Other copper
Component Side:
  rectangle net GND: 10.707,1.074 11.129,1.282
  rectangle net AVCC: 3.54,8.463 4.294,9.376
  region net GND: 8.392,0.931 8.584,1.124 9.926,1.124 9.993,1.191 11.249,1.191 11.249,2.028 11.439,2.219 11.439,3.762 11.288,3.913 10.703,3.913 10.625,3.836 10.625,3.165 10.687,3.103 10.825,3.103 11.092,2.836 11.092,2.29 10.992,2.19 10.404,2.19 10.322,2.272 8.757,2.272 8.416,2.613 8.416,2.86 8.098,2.86 8.098,0.929
  pour cut-out: 11.439,3.762 13.188,3.762 13.188,2.219 11.439,2.219
  region net AGND: 10.538,10.354 12.251,10.354 12.408,10.197 12.408,9.67 12.33,9.593 10.518,9.593
  region net AVCC: 3.326,10.348 1.441,10.348 1.408,10.314 1.408,9.593 3.324,9.593
  region net AGND: 3.82,10.505 1.155,10.505 1.155,11.385 2.035,11.385 2.12,11.47 3.82,11.47
  region net GND: 7.3,4.53 8.926,4.53 9.069,4.672 9.486,4.672 9.486,5.131 8.926,5.691 8.926,6.421 7.817,6.421 7.298,5.901
Solder Side:
  region net DVCC_IO: 0.908,7.525 1.384,7.525 1.384,7.67 3.448,9.734 3.448,9.91 2.412,9.91 2.251,9.749 2.251,9.338 1.073,8.16 0.908,8.16
  region net GND: 11.851,8.624 12.143,8.915 12.143,9.331 12.764,9.331 12.764,8.282 11.748,8.282 11.748,8.624
  region net AGND: 11.742,8.152 11.742,8.073 12.223,7.592 12.764,7.592 12.764,8.152

## Silkscreen, mask and mechanical layers (free items; w line width, h text height)
Top Solder:
  rectangle: 12.439,8.87 12.598,9.592
  rectangle: 9.91,1.74 11.064,2.87
  rectangle: 8.968,3.367 9.624,4.327
  rectangle: 8.618,0.454 9.805,2.931
  rectangle: 6.425,4.809 6.634,6.007
  rectangle: 2.588,4.811 3.015,6.006
Mechanical 32:
  lines w2: -1.25,8 -1.25,0 ; -1.25,14 -1.25,22.025 ; 4,-1.25 0,-1.25 ; 4,23.275 0,23.275 ; 10,-1.25 13.53,-1.25 ; 10,23.275 13.53,23.275 ; 14.78,8 14.78,0 ; 14.78,14 14.78,22.025 ; -1.25,0 ccw(c0,0) 0,-1.25 ; -1.25,0 ccw(c0,0) 0,-1.25 ; -1.25,22.025 cw(c0,22.025) 0,23.275 ; -1.25,22.025 cw(c0,22.025) 0,23.275 ; 13.53,-1.25 ccw(c13.53,0) 14.78,0 ; 13.53,-1.25 ccw(c13.53,0) 14.78,0 ; 13.53,23.275 cw(c13.53,22.025) 14.78,22.025 ; 13.53,23.275 cw(c13.53,22.025) 14.78,22.025

## Dimensions
0,0 to 13.53,0 on Mechanical 8
13.53,0 to 13.53,22.025 on Mechanical 8